# Altium PCB Rackmount_DSP.PcbDoc (part 21 of 24)
Units mil, origin at the board's own origin, x right, y up, seen from the top; angles counter-clockwise.
Board outline 10629.92 x 8267.72 mil, 4 copper layers (Top Layer, Mid Layer 1, Mid Layer 2, Bottom Layer), stack 36.2 mil thick; 4500 components, 1565 nets, 9765 pads, 3289 vias.
Unrouted connection lines stored in the file: 1.
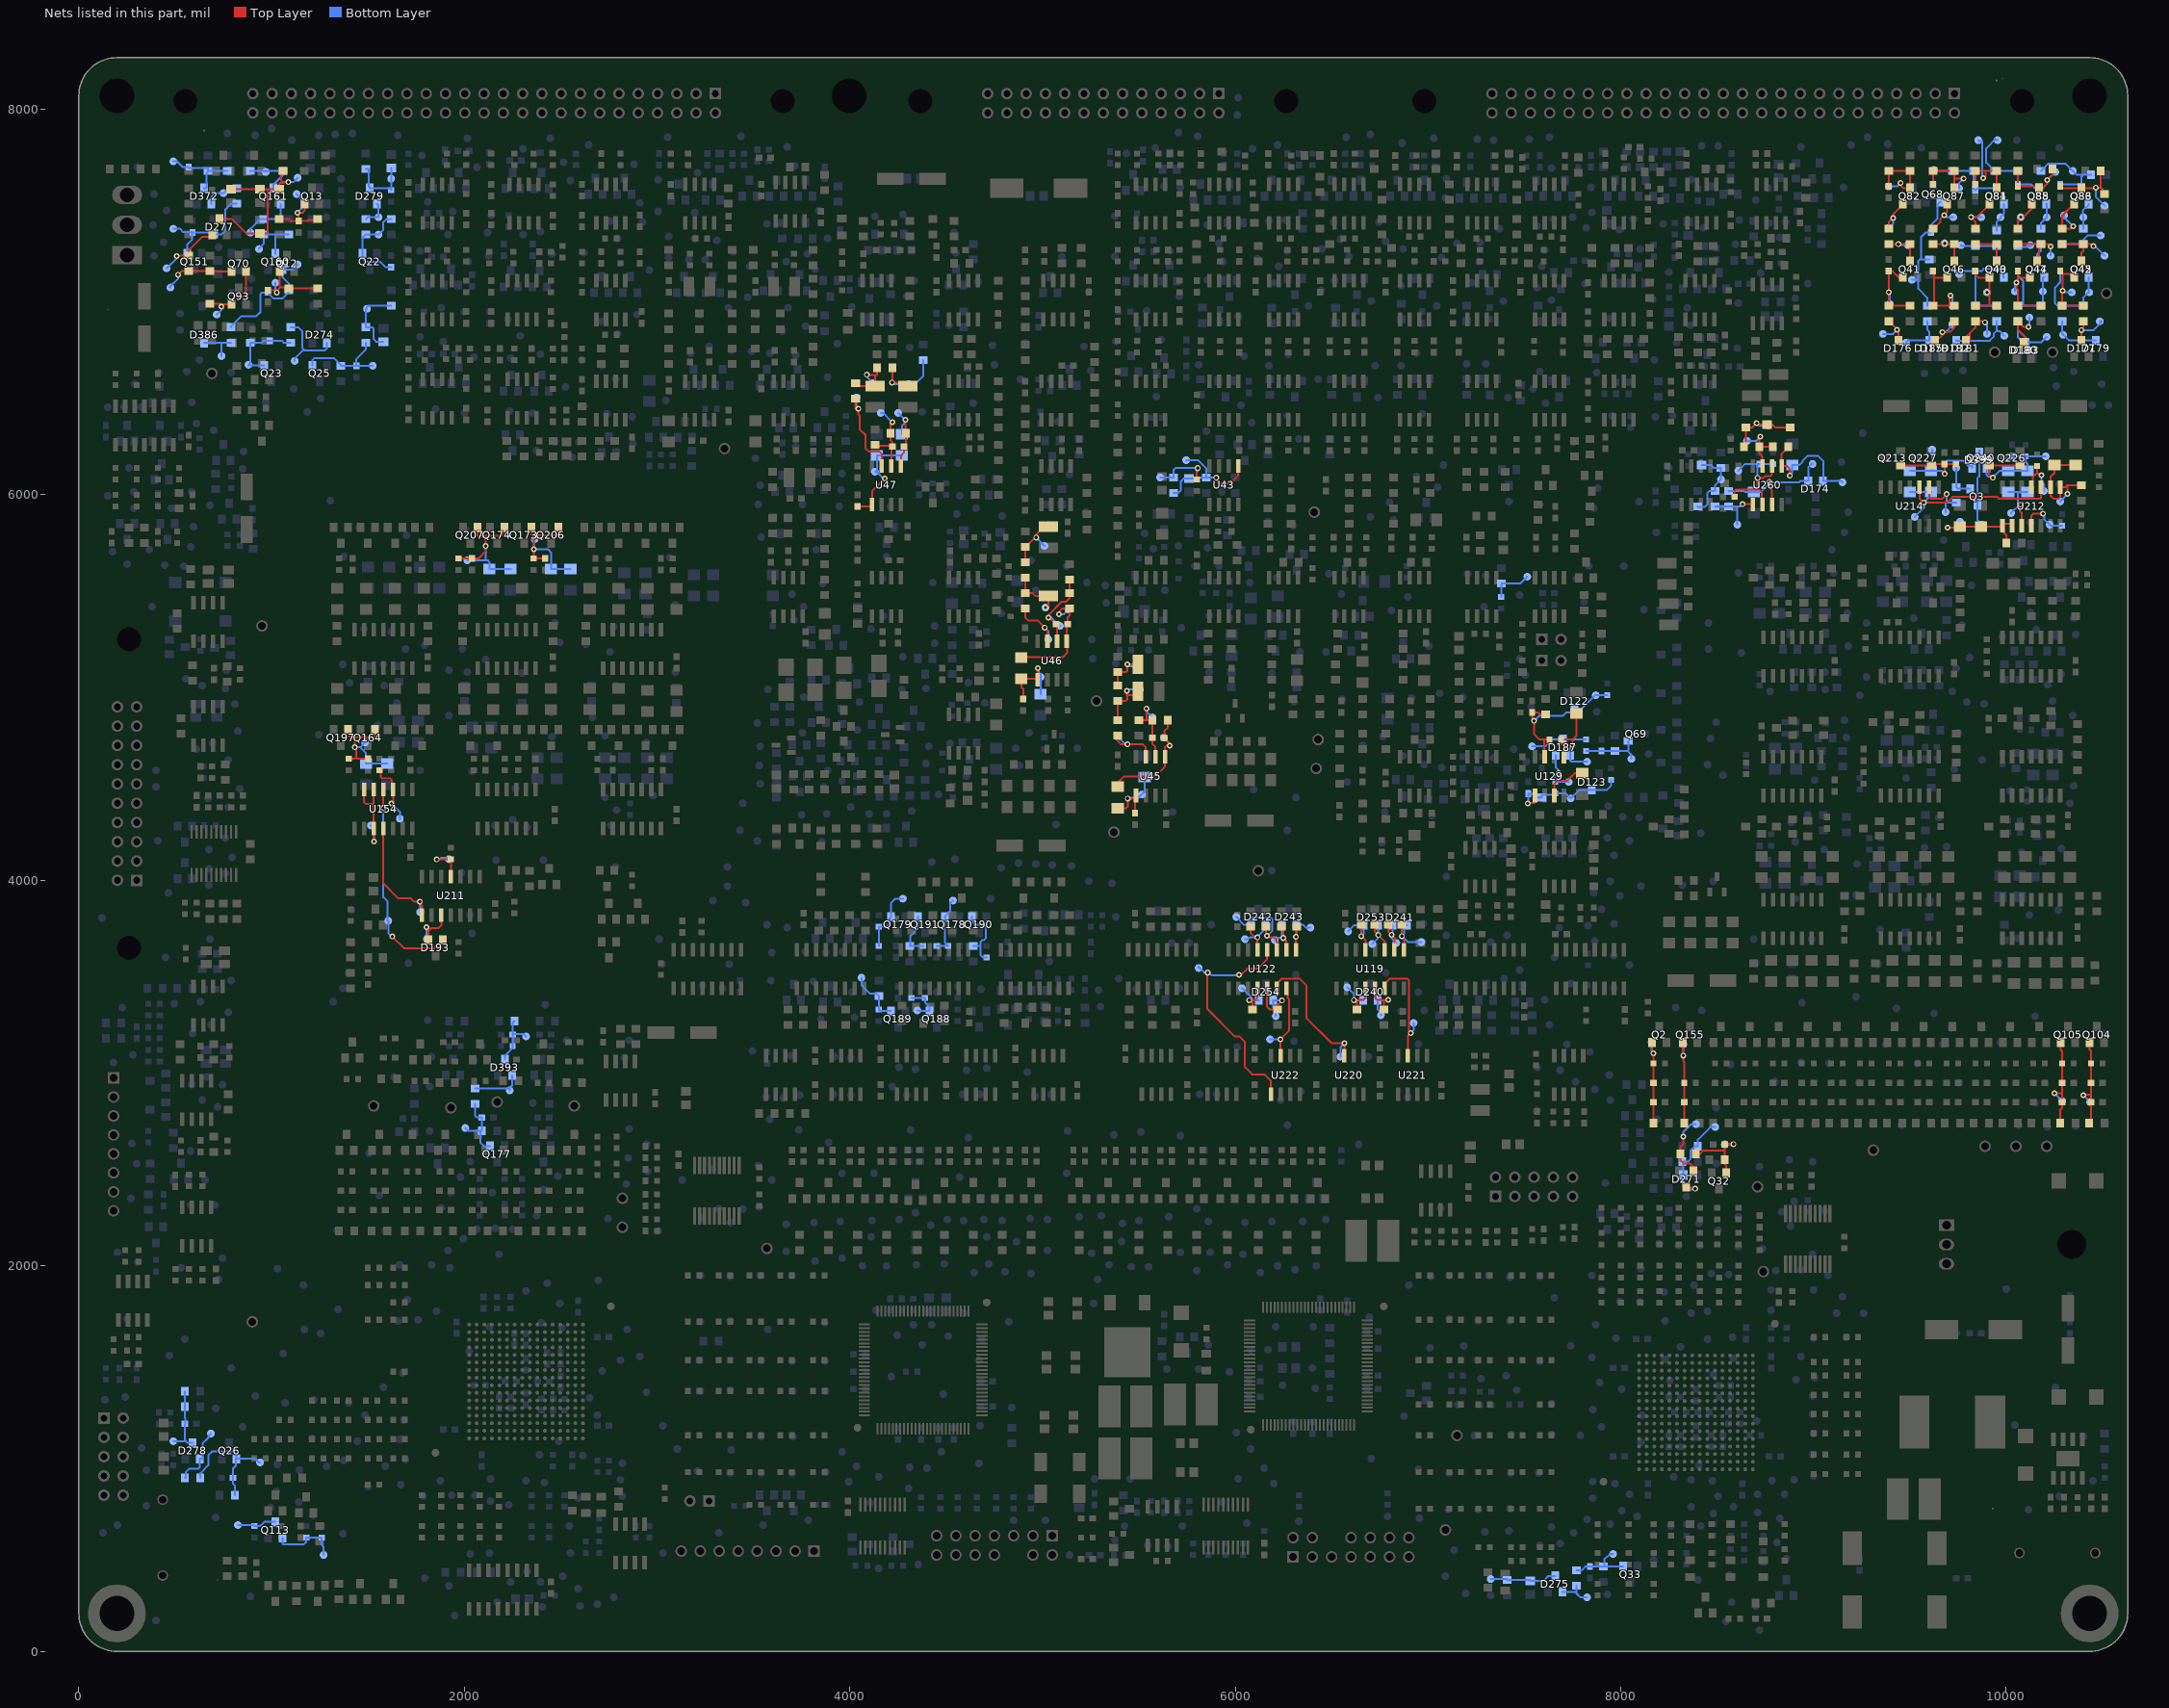
[diagram p23: the nets of this part, all layers, seen from the top]

## Via types
v1: diameter 30, hole 16, Top Layer to Bottom Layer, 3143 vias
v2: diameter 22, hole 12, Top Layer to Bottom Layer, 146 vias

## Nets (pads, with @x,y where several pads share a name; then routed paths per layer and width w, separated by ;. In a path a pad name is that pad's centre, name@x,y a point inside that pad or via, vN(x,y) a via of type N, cw(c..) or ccw(c..) an arc to the next point about the centre after c; other vN are vias at no path point) (continued)
XSIG250120: C1121.2 Q164.1 Q197.1 R2535.1 R2679.2 R2680.2 TP1847.1 | length 694.2
  Top Layer w10: Q197.1@1397.5,4781.5 1397.5,4752.03 1406.53,4743 1436.29,4743 ; R2535.1@1400,4630 1431,4630 1437.99,4636.99 ; C1121.2@1500,4630 1445.06,4630 1438.07,4636.99 1437.99,4636.99 ; Q164.1@1537.5,4781.5 1537.5,4752.96 1527.54,4743 1436.29,4743 ; 1436.29,4743 1436.29,4740.93 1431.29,4735.93 v1(1431.29,4690.01) 1437.99,4683.3 1437.99,4636.99
  Bottom Layer w10: v1(1431.29,4690.01) 1459.6,4690.01 ; TP1847.1@1485,4715 1460.01,4690.01 1459.6,4690.01 ; R2680.2@1600,4605 R2679.2@1490,4605 1490,4659.6 1459.6,4690.01
XSIG250129: TP1637.1 U154.5 U154.6 U154.10 | length 482.6
  Top Layer w10: U154.6@1480,4470 1480,4405.06 1489.9,4395.16 1522.56,4395.16 ; U154.5@1530,4470 1530,4402.6 1522.56,4395.16 ; v1(1530.99,4201.27) 1530.99,4219.01 1530,4220 U154.10@1530,4270 1530,4395.16 1522.56,4395.16
  Bottom Layer w10: TP1637.1@1515,4285 1516.76,4285 1530.99,4270.77 v1(1530.99,4201.27)
XSIG250132: TP1638.1 U154.11 U211.8 | length 641.9
  Top Layer w10: U154.11@1580,4270 1580,3984.36 1658.39,3905.97 1722.42,3905.97 1739.58,3888.8 v1(1769.58,3888.8) 1769.58,3880.42 1780,3870 U211.8@1780,3820
  Bottom Layer w10: v1(1769.58,3888.8) 1770,3888.39 TP1638.1@1770,3835
XSIG250134: D193.1 TP1639.1 U154.4 | length 1094.9
  Top Layer w10: v1(1580,4375.11) U154.4@1580,4470 ; v1(1625.77,3708.65) 1686.89,3647.53 1843.53,3647.53 D193.1@1887.5,3691.5
  Bottom Layer w10: v1(1580,4375.11) 1580,3912.74 1601.89,3890.84 1601.89,3790 TP1639.1@1605,3790 1605,3726.61 v1@1626.19,3705.42 ; v1(1625.77,3708.65) 1626.19,3708.65 v1@1626.19,3705.42 ; v1@1626.19,3705 v1@1626.19,3705.42
XSIG250135: D193.2 TP1640.1 U211.10 | length 264.8
  Top Layer w10: v1(1804.02,3756.86) 1812.5,3748.38 1812.5,3736.44 ; D193.2@1812.5,3691.5 1812.5,3736.44 ; U211.10@1880,3820 1880,3766.24 1865.53,3751.77 1827.83,3751.77 1812.5,3736.44
  Bottom Layer w10: v1(1804.02,3756.86) 1804.02,3700.5 1805,3699.52 TP1640.1@1805,3695
XSIG250160: R2510.1 TP1641.1 U211.4 | length 235.6
  Top Layer w10: v1(1857,4108.17) 1897.17,4108.17 1899,4110 R2510.1@1930,4110 U211.4@1930,4020
  Bottom Layer w10: v1(1857,4108.17) 1872.11,4108.17 1879.66,4115.73 1920,4115.73 TP1641.1@1920,4110
XSIG250174: C1118.2 Q177.1 R2544.1 R2557.1 TP1846.1 | length 381.6
  Bottom Layer w10: TP1846.1@2005,2715 2020,2700 R2557.1@2090,2700 ; R2544.1@2055,2840 2055,2779.5 2059.3,2775.2 2064.5,2770 C1118.2@2090,2770 R2557.1@2090,2700 ; Q177.1@2132.5,2621.5 2101.12,2621.5 2082.26,2640.36 2082.26,2692.26 R2557.1@2090,2700
XSIG250179: D393.1 R2544.2 TP1845.1 | length 264.9
  Bottom Layer w10: R2544.2@2055,2920 2232.17,2920 TP1845.1@2235,2917.17 ; TP1845.1@2235,2910 TP1845.1@2235,2917.17 ; D393.1@2247.5,2988.5 2247.5,2935.33 2242.7,2930.53 2235,2922.83 TP1845.1@2235,2917.17
XSIG250180: C1141.1 D393.3 R2539.2 R2611.1 TP1844.1 | length 294.1
  Bottom Layer w10: D393.3@2210,3071.5 2210,3088.42 2250,3128.42 R2611.1@2250,3140 C1141.1@2250,3200 C1141.1@2250,3201.73 ; R2539.2@2260,3270 2250,3260 C1141.1@2250,3201.73 ; TP1844.1@2320,3190 2308.27,3201.73 C1141.1@2250,3201.73
XSIG250183: R1575.1 R2562.2 TP1721.1 | length 219.5
  Bottom Layer w10: R1575.1@7380,5470 R2562.2@7380,5540 7478.68,5540 7513.68,5575 TP1721.1@7515,5575
XSIG250184: C953.2 R1955.2 R2563.1 TP1259.1 U43.1 | length 663.1
  Top Layer w10: v1(5900.87,6088.71) 5900.87,6079 5919.88,6060 5975,6060 6015,6100 U43.1@6015,6150
  Bottom Layer w10: R2563.1@5680,6010 5704.48,6010 5717.57,6023.09 5717.57,6069.71 5732.86,6085 C953.2@5760,6085 5807.5,6085 5812.5,6090 R1955.2@5850,6090 ; TP1259.1@5745,6180 5805.97,6180 5850,6135.97 R1955.2@5850,6090 ; v1(5900.87,6088.71) 5900.87,6079 5889.88,6090 R1955.2@5850,6090
XSIG250187: R1576.1 R2563.2 TP1722.1 | length 298.9
  Top Layer w10: R1576.1@5800,6080 5800,6133.01 v1(5805.27,6138.27)
  Bottom Layer w10: TP1722.1@5610,6090 R2563.2@5680,6090 5680,6129.6 5688.67,6138.27 v1(5805.27,6138.27)
XSIG250195: C1131.2 Q173.1 Q206.1 R2344.2 R2531.1 R2677.2 TP1723.1 | length 736.6
  Top Layer w10: Q173.1@2347.5,5831.5 2347.5,5792.89 2350.32,5790.06 2350.44,5790.06 ; v1(2360.3,5717.77) v1@2360,5717.77 ; C1131.2@2420,5670 R2531.1@2360,5670 v1@2360,5717.77 ; Q206.1@2487.5,5831.5 2487.5,5799.92 2477.64,5790.06 2350.44,5790.06 ; 2350.44,5790.06 2360,5780.5 v1@2360,5717.77
  Bottom Layer w10: TP1723.1@2365,5770 2365,5765.9 2360.3,5761.21 v1(2360.3,5717.77) 2433.22,5717.77 2450,5701 R2677.2@2450,5615 R2344.2@2550,5615
XSIG250212: C1132.2 Q174.1 Q207.1 R2343.2 R2532.1 R2669.2 TP1724.1 | length 790.9
  Top Layer w10: R2532.1@1970,5670 C1132.2@2040,5670 2074.22,5670 2110,5705.78 v1(2110,5733.83) 2110,5786.18 2109.18,5787 ; Q207.1@2067.5,5831.5 2067.5,5793 2068.67,5791.83 2068.67,5790.75 2072.42,5787 2109.18,5787 ; Q174.1@2207.5,5831.5 2207.5,5804.4 2190.1,5787 2109.18,5787
  Bottom Layer w10: TP1724.1@2015,5660 2110,5660 ; v1(2110,5733.83) 2110,5660 ; R2669.2@2240,5615 R2343.2@2130,5615 2130,5651.01 2121.01,5660 2110,5660
XSIG250231: R2646.1 TP1843.1 U154.3 | length 332.6
  Top Layer w10: R2646.1@1560,4570 1565.25,4570 1565.25,4536.81 1572.32,4529.74 1614.42,4529.74 1623.5,4520.67 1623.5,4470 U154.3@1630,4470 1630,4408.66 v1(1620.84,4399.5)
  Bottom Layer w10: v1(1620.84,4399.5) 1665,4355.34 TP1843.1@1665,4320
XSIG260008: C768.2 R1084.1 R1853.2 TP1271.1 | length 346
  Top Layer w10: R1084.1@5390,4830 R1853.2@5390,4930 5430.47,4930 5439.78,4939.31 5439.78,4959.68 ; v1(5437.5,4983.77) 5437.5,4959.68 5439.78,4959.68 ; C768.2@5495,4980 5495,4959.68 5439.78,4959.68
  Bottom Layer w10: v1(5437.5,4983.77) 5443.73,4990 TP1271.1@5505,4990
XSIG260009: C763.2 R1853.1 R1856.2 TP1272.1 | length 259.9
  Top Layer w10: R1853.1@5390,5010 R1856.2@5390,5080 5432.71,5080 5439.98,5087.27 v1(5439.98,5120) C763.2@5495,5120
  Bottom Layer w10: v1(5439.98,5120) 5449.98,5110 TP1272.1@5485,5110
XSIG260017: R1085.2 TP1273.1 U46.3 | length 315.2
  Top Layer w10: R1085.2@4910,5410 4910,5363.76 4925.09,5348.67 4973.83,5348.67 v1(5011.22,5311.28) 5025,5297.5 U46.3@5025,5240
  Bottom Layer w10: v1(5011.22,5311.28) 5030,5292.5 TP1273.1@5030,5250
XSIG260018: C537.1 R1845.2 R1851.1 TP71.1 U46.5 | length 395.8
  Top Layer w10: C537.1@4900,4940 4900,4992.5 4890,5002.5 R1845.2@4890,5045 U46.5@4975,5045 ; U46.5@4975,5040 U46.5@4975,5045 ; v1(4975.98,5100.24) 4975,5099.27 U46.5@4975,5045
  Bottom Layer w10: v1(4975.98,5100.24) 4975.98,5085.87 4990,5071.84 TP71.1@4990,5055 R1851.1@4990,4965
XSIG260021: C769.2 R1085.1 R1854.2 TP1274.1 | length 276.6
  Top Layer w10: R1854.2@4910,5570 R1085.1@4910,5490 4948.75,5490 4963.75,5475 C769.2@5030,5475 5030,5426.96 5016.33,5413.29 5016.33,5415 v1(5015,5415)
XSIG260022: C764.2 R1854.1 R1857.2 TP1275.1 | length 314.8
  Top Layer w10: R1854.1@4910,5650 R1857.2@4910,5730 4912.5,5730 v1@4963.75,5781.25 ; v1(4966.85,5778.15) v1@4963.75,5781.25 ; C764.2@5030,5835 5007.5,5835 4963.75,5791.25 v1@4963.75,5781.25
  Bottom Layer w10: v1(4966.85,5778.15) TP1275.1@5010,5735
XSIG260030: R1086.2 TP1276.1 U47.3 | length 511.4
  Top Layer w10: R1086.2@4030,6500 4030,6447.21 4035,6442.21 4035.29,6442.5 4043.57,6442.5 v1@4044.93,6443.85 ; v1(4044.93,6447.17) v1@4044.93,6443.85 ; U47.3@4165,6150 4165,6212.66 4152.66,6225 4097.89,6225 4081.21,6241.68 4081.21,6309.51 4052.28,6338.44 4052.28,6409.12 4044.93,6416.47 v1@4044.93,6443.85
  Bottom Layer w10: TP1276.1@4035,6505 4035,6457.09 v1(4044.93,6447.17)
XSIG260031: C538.1 R1846.2 R1852.1 TP1277.1 U47.5 | length 526.8
  Top Layer w10: C538.1@4040,5940 4115,5940 U47.5@4115,5950 4115,6018.53 v1(4180.43,6083.96)
  Bottom Layer w10: TP1277.1@4130,6120 TP1277.1@4140,6120 ; v1(4180.43,6083.96) 4175.46,6083.96 4140,6119.42 TP1277.1@4140,6120 ; R1846.2@4270,6205 R1852.1@4140,6205 TP1277.1@4140,6120
XSIG260034: C770.2 R1086.1 R1855.2 TP1278.1 | length 313.1
  Top Layer w10: R1086.1@4030,6580 4045,6565 C770.2@4130,6565 4130,6612.5 ; v1(4087.92,6622.98) 4089.74,6621.16 4130,6621.16 4130,6612.5 ; R1855.2@4140,6660 4140,6622.5 4130,6612.5
  Bottom Layer w10: v1(4087.92,6622.98) 4087.92,6612.08 TP1278.1@4120,6580
XSIG260035: C765.2 R1855.1 R1858.2 TP1279.1 | length 441.4
  Top Layer w10: v1(4219.34,6582.46) v1@4220,6582.46 ; R1855.1@4220,6660 v1@4220,6582.46 ; C765.2@4300,6565 4300,6582.46 v1@4220,6582.46
  Bottom Layer w10: v1(4219.34,6582.46) 4226.8,6575 TP1279.1@4305,6575 4340.76,6575 4380,6614.24 R1858.2@4380,6700
XSIG260045: C536.1 R1844.2 R1850.1 TP1280.1 U45.5 | length 410.1
  Top Layer w10: R1844.2@5390,4375 5434.49,4375 5441.35,4381.86 v1@5441.35,4422.85 ; v1(5441.35,4424.93) v1@5441.35,4422.85 ; C536.1@5480,4350 U45.5@5480,4423.59 ; U45.5@5485,4440 5485,4428.59 U45.5@5480,4423.59 ; v1@5441.35,4422.85 5443.43,4424.93 5478.66,4424.93 U45.5@5480,4423.59
  Bottom Layer w10: v1(5441.35,4424.93) 5441.35,4428.35 5497.13,4428.35 TP1280.1@5513.78,4445 ; TP1280.1@5515,4445 TP1280.1@5513.78,4445 ; R1850.1@5530,4535 5530,4461.22 TP1280.1@5513.78,4445
XSIG260048: C520.2 R1844.1 R1859.2 TP1281.1 U45.1 | length 633.7
  Top Layer w10: R1844.1@5390,4485 5390,4506.18 5423.09,4539.26 5584.26,4539.26 5635,4590 U45.1@5635,4640 5635,4690 5643.88,4698.88 v1(5658.91,4698.88) 5658.91,4712.59 C520.2@5631.5,4740 ; C520.2@5630,4740 C520.2@5631.5,4740 ; R1859.2@5650,4830 5650,4792.71 5630.9,4773.61 5630.9,4740.6 C520.2@5631.5,4740
  Bottom Layer w10: TP1281.1@5630,4740 5658.91,4711.09 v1(5658.91,4698.88)
XSIG260050: C520.1 R1097.2 R1859.1 TP1282.1 U45.2 | length 385.9
  Top Layer w10: R1097.2@5500,4830 5538.77,4830 ; v1(5538.77,4890.82) 5538.77,4830 ; U45.2@5585,4640 5584.87,4640 5584.87,4692.85 5570,4707.72 C520.1@5570,4740 R1859.1@5570,4830 5538.77,4830
  Bottom Layer w10: v1(5538.77,4890.82) 5538.77,4876.23 TP1282.1@5570,4845
XSIG260053: R1084.2 TP1283.1 U45.3 | length 302.7
  Top Layer w10: R1084.2@5390,4750 5390,4722.32 5405.79,4706.52 v1(5440.72,4706.52) 5518.48,4706.52 5535,4690 U45.3@5535,4640
  Bottom Layer w10: TP1283.1@5390,4745 5428.48,4706.52 v1(5440.72,4706.52)
XSIG260054: C522.2 R1846.1 R1861.2 TP1284.1 U47.1 | length 392.3
  Top Layer w10: U47.1@4265,6150 4265,6204 4280,6219 C522.2@4280,6250 4290,6250 R1861.2@4290,6320 4290,6323.96 4289.17,6324.79 v1(4289.17,6389.46)
  Bottom Layer w10: TP1284.1@4250,6425 4285.54,6389.46 v1(4289.17,6389.46) 4289.17,6376.67 4270,6357.5 R1846.1@4270,6315
XSIG260056: C522.1 R1099.2 R1861.1 TP1285.1 U47.2 | length 418.5
  Top Layer w10: R1099.2@4130,6260 4130,6253.58 C522.1@4215,6253.58 ; U47.2@4215,6150 C522.1@4215,6253.58 ; C522.1@4220,6250 C522.1@4220,6256.25 ; v1(4220.83,6376.21) 4210,6365.38 R1861.1@4210,6320 4210,6282.5 4220,6272.5 C522.1@4220,6256.25 ; C522.1@4215,6253.58 4215,6256.25 C522.1@4220,6256.25
  Bottom Layer w10: TP1285.1@4160,6425 4172.04,6425 v1(4220.83,6376.21)
XSIG260059: C521.2 R1845.1 R1860.2 TP1286.1 U46.1 | length 624.8
  Top Layer w10: R1845.1@4890,5155 4890,5156.86 5105.06,5156.86 5126.65,5178.45 5126.65,5240 U46.1@5125,5240 5125,5330 C521.2@5130,5330 5130,5365 5140,5375 R1860.2@5140,5410 5102.5,5410 5085.5,5393 v1(5085.5,5379.55)
  Bottom Layer w10: v1(5085.5,5379.55) 5109.55,5379.55 TP1286.1@5135,5405
XSIG260064: C801.1 R1196.2 R1263.1 R1686.2 TP173.1 | length 400.8
  Bottom Layer w10: R1196.2@8400,5940 8400,5936.91 8436.24,5936.91 8448.24,5948.92 8448.24,6008.07 8460.17,6020 R1263.1@8490,6020 8490,6050 TP173.1@8520,6080 R1686.2@8520,6140 8482.5,6140 8467.5,6155 C801.1@8420,6155
XSIG260066: R1263.2 R1621.1 TP1288.1 U260.5 | length 297.8
  Top Layer w10: v1(8631.92,5951.18) 8685,5951.18 U260.5@8685,5950
  Bottom Layer w10: R1263.2@8490,5940 R1621.1@8560,5940 8600.29,5940 ; TP1288.1@8605,5845 8605,5935.29 8600.29,5940 ; v1(8631.92,5951.18) 8620.75,5940 8600.29,5940
XSIG260067: C539.1 R1938.1 R2069.2 TP514.1 U260.2 U260.6 | length 699.7
  Top Layer w10: R2069.2@8590,5990 8590,6019.22 8598.84,6028.05 8710,6028.05 ; U260.6@8735,5950 8731.77,5950 8731.77,6013.13 8716.85,6028.05 8710,6028.05 ; U260.2@8785,6150 8784.45,6150 8784.45,6106.83 8774.47,6096.84 8748.98,6096.84 8740,6087.86 v1(8710,6087.86) 8710,6028.05
  Bottom Layer w10: TP514.1@8610,6125 8645,6160 C539.1@8710,6160 ; v1(8710,6087.86) C539.1@8710,6160 ; R1938.1@8790,6160 C539.1@8720,6160 C539.1@8710,6160
XSIG260074: D174.1 R1433.1 R1621.2 TP172.1 U260.7 | length 671.2
  Top Layer w10: v1(8771.41,6066.84) 8771.41,6036.84 8785,6023.25 U260.7@8785,5950
  Bottom Layer w10: R1621.2@8560,6020 8638.5,6020 8643.5,6015 R1433.1@8690,6015 8726.98,6015 8771.41,6059.43 v1(8771.41,6066.84) 8773.72,6064.53 8925.33,6064.53 8932.3,6071.5 D174.1@8972.5,6071.5 8972.5,6144.22 8991.64,6163.36 TP172.1@8995,6160
XSIG260076: C800.1 R1197.2 R1264.1 R1687.2 TP1289.1 | length 420.9
  Top Layer w10: R1264.1@8640,6250 8650,6260 R1197.2@8650,6350 8682.93,6350 v1(8705.04,6372.11) 8705.04,6366.21 8706.25,6365 C800.1@8760,6365 8785.19,6365 8800.19,6350 R1687.2@8880,6350
  Bottom Layer w10: v1(8705.04,6372.11) 8717.16,6360 TP1289.1@8765,6360
XSIG260078: R1264.2 R1622.1 TP1290.1 U260.3 | length 309.8
  Top Layer w10: v1(8724.54,6301.73) 8720,6297.19 R1264.2@8720,6250 ; U260.3@8735,6150 8735,6200 8732.5,6200 8720,6212.5 R1264.2@8720,6250 ; R1622.1@8790,6250 R1264.2@8720,6250
  Bottom Layer w10: TP1290.1@8655,6280 8702.81,6280 v1(8724.54,6301.73)
XSIG260080: D174.2 R1434.1 R1622.2 TP1291.1 U260.1 | length 665.6
  Top Layer w10: R1622.2@8870,6250 8870,6247.5 8835,6212.5 U260.1@8835,6150 8861.5,6150 8877.4,6134.1 v1(8877.4,6100)
  Bottom Layer w10: v1(8877.4,6100) 8877.5,6100 8890,6112.5 R1434.1@8890,6155 8926.46,6155 8944.5,6173.03 8944.5,6177.45 8969.26,6202.22 9022.27,6202.22 9052.33,6172.16 9052.33,6076.33 D174.2@9047.5,6071.5 9146.41,6071.5 9151.46,6066.46 TP1291.1@9150,6065
XSIG260092: R1111.2 R1896.2 R1897.2 TP1292.1 U212.1 U212.2 | length 604.1
  Top Layer w10: v1(10316.75,6005.27) 10316.75,6048.67 ; R1897.2@10360,6155 R1896.2@10250,6155 10250,6112.5 10230,6092.5 U212.2@10230,6040 10230,5994.57 10245.31,5979.26 10270.57,5979.26 10280,5988.68 U212.1@10280,6040 10306.5,6040 10315.17,6048.67 10316.75,6048.67 ; R1111.2@10390,6050 10390,6048.67 10316.75,6048.67
  Bottom Layer w10: TP1292.1@10280,5965 10312.19,5997.19 10312.19,6000 10316.75,6004.56 v1(10316.75,6005.27)
XSIG260095: R1112.2 R1898.2 R1899.2 TP1751.1 U212.8 U212.9 | length 533.6
  Top Layer w10: v1(9695.46,5829.38) 9754.38,5829.38 R1898.2@9760,5835 R1899.2@9870,5835 U212.8@9980,5835 ; R1112.2@10000,5750 10000,5792.29 9980,5812.29 U212.8@9980,5835 ; U212.9@10030,5840 10030,5850.6 9980,5850.6 U212.8@9980,5840 U212.8@9980,5835
  Bottom Layer w10: v1(9695.46,5829.38) 9729.38,5829.38 TP1751.1@9760,5860
XSIG260101: R983.2 TP1787.1 U214.2 | length 301.1
  Top Layer w10: U214.2@9600,6040 9600,5988.72 9609.47,5979.24 9666.03,5979.24 v1(9690.36,6003.57)
  Bottom Layer w10: TP1787.1@9685,5910 9685,5952.87 9690.36,5958.23 9690.36,5960 ; v1(9690.36,6003.57) 9690.36,5960 ; R983.2@9740,5960 9690.36,5960
XSIG260102: Q3.1 R983.1 TP1788.1 | length 178.4
  Bottom Layer w10: TP1788.1@9740,6140 9742.92,6137.08 9740,6134.16 R983.1@9740,6040 9748.5,6031.5 Q3.1@9812.5,6031.5
XSIG260128: C846.2 C847.2 Q104.1 R1963.2 R1975.2 TP1301.1 | length 524.8
  Top Layer w10: v1(10400.12,2884.88) 10400.12,2888.9 10440,2888.9 ; R1975.2@10430,2740 10440,2740 C846.2@10440,2850 10440,2888.9 ; Q104.1@10432.5,3158.5 10432.5,3120 10440,3112.5 R1963.2@10440,3050 C847.2@10440,2950 10440,2888.9
  Bottom Layer w10: v1(10400.12,2884.88) TP1301.1@10435,2850
XSIG260134: C844.2 C845.2 Q105.1 R1962.2 R1976.2 TP1302.1 | length 521.4
  Top Layer w10: v1(10250.39,2894.61) 10290,2894.61 ; R1976.2@10280,2740 10280,2809 10290,2819 C845.2@10290,2850 10290,2894.61 ; Q105.1@10282.5,3158.5 10282.5,3120 10290,3112.5 R1962.2@10290,3050 C844.2@10290,2950 10290,2894.61
  Bottom Layer w10: v1(10250.39,2894.61) TP1302.1@10290,2855
XSIG260145: R2513.1 TP1667.1 U212.4 | length 240.8
  Top Layer w10: U212.4@10130,6040 10136.5,6040 10136.5,6090.37 10160,6113.87 ; R2513.1@10160,6150 10160,6113.87 ; v1(10181.98,6102.42) 10171.45,6102.42 10160,6113.87
  Bottom Layer w10: v1(10181.98,6102.42) 10181.98,6068.02 10195,6055 TP1667.1@10195,6020
XSIG260146: R2512.1 TP1303.1 U212.11 | length 258.8
  Top Layer w10: U212.11@10130,5840 10130,5890 10142.7,5902.7 v1(10190.92,5902.7)
  Bottom Layer w10: v1(10190.92,5902.7) 10197.3,5902.7 10197.3,5872.7 TP1303.1@10225,5845 10230,5840 R2512.1@10290,5840
XSIG260148: C521.1 R1098.2 R1860.1 TP1287.1 U46.2 | length 480.1
  Top Layer w10: U46.2@5075,5240 5075,5330 C521.1@5070,5330 5068.5,5330 5035.96,5362.54 v1(5030.69,5362.54) 5030.69,5376.67 5099.11,5445.09 5120.66,5445.09 5140,5464.43 R1860.1@5140,5490 R1098.2@5140,5560
  Bottom Layer w10: v1(5030.69,5362.54) 5047.46,5362.54 TP1287.1@5090,5320
XSIG260164: Q189.1 R2585.1 R2618.1 TP1727.1 | length 287.9
  Bottom Layer w10: TP1727.1@4060,3495 4060.54,3494.46 4060.54,3455.94 4105.38,3411.1 4138.9,3411.1 R2618.1@4150,3400 R2585.1@4150,3330 4158.5,3321.5 Q189.1@4212.5,3321.5
XSIG260167: Q188.1 R2580.2 R2627.2 TP1728.1 | length 211.8
  Bottom Layer w10: R2580.2@4320,3390 R2627.2@4390,3390 4390,3365.8 4412.5,3343.3 Q188.1@4412.5,3321.5 4356.93,3321.5 4353.43,3325 TP1728.1@4350,3325
XSIG260172: Q190.1 R2586.1 R2619.1 | length 346.3
  Bottom Layer w10: Q190.1@4632.5,3811.5 4632.5,3786.6 4649.1,3770 4693.21,3770 4705,3758.21 4705,3698.79 4696.21,3690 4687.79,3690 4679,3681.21 4679,3660 ; R2619.1@4640,3660 4679,3660 ; R2586.1@4710,3600 4690.52,3600 4679,3611.52 4679,3660
XSIG260175: Q178.1 R2581.2 R2628.2 TP1842.1 | length 319.9
  Bottom Layer w10: R2628.2@4450,3660 R2581.2@4510,3660 4492.5,3677.5 Q178.1@4492.5,3811.5 4520.82,3839.82 4520.82,3880.82 TP1842.1@4535,3895
XSIG260186: Q191.1 R2587.1 R2620.1 | length 238.1
  Bottom Layer w10: R2620.1@4310,3660 R2620.1@4312.5,3660 ; Q191.1@4352.5,3811.5 4352.5,3750.15 4313.98,3711.63 4313.98,3661.48 R2620.1@4312.5,3660 ; R2587.1@4380,3660 R2620.1@4312.5,3660
XSIG260189: Q179.1 R2582.2 R2629.2 TP1729.1 | length 343.1
  Bottom Layer w10: R2582.2@4150,3660 R2629.2@4150,3760 4190.25,3760 4206.22,3775.97 4206.22,3801.72 4212.5,3808 Q179.1@4212.5,3811.5 4212.5,3881.3 4236.2,3905 TP1729.1@4275,3905
XSIG260206: C1161.2 D399.2 Q213.1 Q227.1 R2654.1 R2681.2 R2682.2 TP1841.1 | length 868.3
  Top Layer w10: Q213.1@9451.5,6152.5 Q227.1@9611.5,6152.5 9619,6160 C1161.2@9680,6160 ; v1(9679.84,6108.34) 9679.84,6127.34 9680,6127.5 C1161.2@9680,6160 ; R2654.1@9740,6160 C1161.2@9680,6160
  Bottom Layer w10: R2681.2@9500,6125 R2682.2@9610,6125 ; TP1841.1@9615,6235 9615,6130 R2682.2@9610,6125 ; D399.2@9822.5,6138.5 9822.5,6148.5 9804.97,6148.5 9775.56,6177.91 9693.94,6177.91 9679.84,6163.82 v1(9679.84,6108.34) 9663.18,6125 R2682.2@9610,6125
XSIG260209: R2681.1 R2682.1 TP1298.1 U212.3 U214.3 | length 1044.2
  Top Layer w10: U214.3@9550,6040 9550,5981.4 v1(9572.16,5959.24) 9692.08,5959.24 9721.5,5988.66 9952.84,5988.66 9961.3,5980.21 10177.54,5980.21 10180,5982.67 U212.3@10180,6040
  Bottom Layer w10: R2681.1@9500,6015 R2682.1@9603.16,6015 ; TP1298.1@9525,5885 9572.16,5932.16 v1(9572.16,5959.24) 9603.16,5990.25 R2682.1@9603.16,6015 ; R2682.1@9610,6015 R2682.1@9603.16,6015
XSIG260227: C1160.2 D399.1 Q226.1 Q240.1 R2653.1 R2683.2 R2684.2 TP1840.1 | length 754.5
  Top Layer w10: v1(9929.64,6088.69) 9911.5,6106.83 Q240.1@9911.5,6152.5 Q226.1@10071.5,6152.5
  Bottom Layer w10: D399.1@9897.5,6138.5 9897.5,6102.83 9906.37,6093.96 9924.37,6093.96 v1(9929.64,6088.69) 9965.95,6125 R2684.2@10010,6125 R2683.2@10110,6125 10110,6160 10100,6170 R2653.1@10100,6200 ; C1160.2@10030,6200 R2653.1@10100,6200 ; TP1840.1@10205,6200 R2653.1@10100,6200
XSIG260230: R2683.1 R2684.1 TP1839.1 U212.10 | length 354.1
  Top Layer w10: v1(10074.66,5948.31) 10070.61,5944.26 10070.61,5915.26 10080,5905.87 U212.10@10080,5840
  Bottom Layer w10: R2684.1@10010,6015 10060.25,6015 ; TP1839.1@10025,5905 10068.31,5948.31 v1(10074.66,5948.31) 10074.66,5949.28 10060.25,5963.69 10060.25,6015 ; R2683.1@10110,6015 10060.25,6015
XSIG260232: D399.3 Q3.3 TP1838.1 | length 411
  Bottom Layer w10: D399.3@9860,6221.5 9860,6231.13 D399.3@9860.19,6231.31 ; D399.3@9860,6231.5 D399.3@9860.19,6231.31 ; TP1838.1@9875,5845 9850,5870 Q3.3@9850,5948.5 9850,6086.75 9860.19,6096.94 D399.3@9860.19,6231.31
XSIG270001: Q81.1 R1265.1 TP1304.1 | length 249
  Top Layer w10: R1265.1@9840,7380 9840,7416.78 v1(9816.78,7440) 9847.5,7440 9912.5,7505 Q81.1@9912.5,7508.5
  Bottom Layer w10: v1(9816.78,7440) TP1304.1@9870,7440
XSIG270002: C404.2 Q40.1 R977.1 R1360.2 TP1305.1 | length 383.8
  Top Layer w10: R977.1@9840,6980 9910.59,6980 9912.5,6981.91 ; C404.2@9840,7160 9840,7142.5 9857.26,7125.23 Q40.1@9912.5,7125.23 ; v1@9897.62,7051.27 v1@9900,7051.27 ; Q40.1@9912.5,7128.5 Q40.1@9912.5,7125.23 ; R1360.2@9950,6980 9912.5,6980 9912.5,6981.91 ; v1@9900,7051.27 9912.5,7051.27 Q40.1@9912.5,7125.23 ; v1@9900,7051.27 v1(9900,7050) 9912.5,7050 9912.5,6981.91
XSIG270006: C1110.1 Q81.3 R1143.1 R1380.2 TP1789.1 | length 538.3
  Top Layer w10: C1110.1@9840,7610 R1143.1@9840,7680 9893,7680 ; v1(9880.57,7642.64) 9880.57,7647.64 9893,7647.64 9893,7680 ; Q81.3@9950,7591.5 R1380.2@9950,7680 9893,7680
  Bottom Layer w10: TP1789.1@9855,7840 9860,7835 9874.19,7835 9874.19,7647.64 9880.57,7647.64 v1(9880.57,7642.64)
XSIG270013: Q40.3 R1265.2 R1393.1 | length 198.5
  Top Layer w10: R1265.2@9840,7300 R1393.1@9950,7300 Q40.3@9950,7211.5
XSIG270014: Q82.1 R1266.1 TP1308.1 | length 220.1
  Top Layer w10: R1266.1@9390,7380 9390,7415 9410.96,7435.96 v1(9412.88,7435.96) 9412.88,7455.38 9462.5,7505 Q82.1@9462.5,7508.5
  Bottom Layer w10: TP1308.1@9390,7385 9412.88,7407.88 v1(9412.88,7435.96)
XSIG270015: C405.2 Q41.1 R978.1 R1361.2 TP1309.1 | length 438.6
  Top Layer w10: Q41.1@9462.5,7128.5 9441.88,7128.5 9410.38,7160 C405.2@9390,7160 v1(9390,7050.98) R978.1@9390,6980 R1361.2@9500,6980
  Bottom Layer w10: v1(9390,7050.98) 9395,7045.98 TP1309.1@9395,6990
XSIG270019: C1108.1 Q82.3 R1144.1 R1381.2 TP1310.1 | length 415.2
  Top Layer w10: C1108.1@9390,7600 R1381.2@9390,7680 R1144.1@9500,7680 Q82.3@9500,7591.5 9465,7591.5 9451.84,7604.66 v1(9451.84,7618.35)
  Bottom Layer w10: TP1310.1@9390,7600 9433.49,7600 v1(9451.84,7618.35)
XSIG270026: Q41.3 R1266.2 R1394.1 TP1311.1 | length 250.6
  Top Layer w10: R1266.2@9390,7300 v1(9439.97,7300) R1394.1@9500,7300 Q41.3@9500,7211.5
  Bottom Layer w10: v1(9439.97,7300) 9444.97,7295 TP1311.1@9490,7295
XSIG270027: Q83.1 R1267.1 TP178.1 | length 142.5
  Bottom Layer w10: R1267.1@10400,7380 TP178.1@10400,7440 10396.89,7443.11 10396.89,7474.39 10427.5,7505 Q83.1@10427.5,7508.5
XSIG270028: C406.2 Q42.1 R973.1 R1362.2 TP177.1 | length 494.3
  Bottom Layer w10: C406.2@10280,7160 10280,7101.98 10253.39,7075.38 10253.39,6992.63 10266.03,6980 R973.1@10290,6980 R1362.2@10400,6980 10400,7024.07 10425.93,7050 TP177.1@10429.43,7050 ; Q42.1@10427.5,7128.5 10427.5,7051.93 TP177.1@10429.43,7050 ; TP177.1@10430,7050 TP177.1@10429.43,7050
XSIG270032: C1103.1 Q83.3 R1145.1 R1382.2 TP176.1 | length 489.4
  Bottom Layer w10: R1145.1@10180,7680 10217.01,7717.01 10307.73,7717.01 10344.87,7679.87 TP176.1@10345,7680 10365,7660 10400.17,7660 ; C1103.1@10280,7610 10371.5,7610 Q83.3@10390,7591.5 10390,7649.83 10400.17,7660 ; R1382.2@10440,7660 10400.17,7660
XSIG270039: Q42.3 R1267.2 R1395.1 TP175.1 | length 325.2
  Bottom Layer w10: R1395.1@10290,7300 R1267.2@10400,7300 ; Q42.3@10390,7211.5 10390,7255 10400,7265 R1267.2@10400,7300 ; TP175.1@10490,7345 10421.31,7345 10400,7323.69 R1267.2@10400,7300
XSIG270040: Q84.1 R1268.1 TP174.1 | length 155.3
  Bottom Layer w10: R1268.1@9950,7370 9950,7414.02 9970,7434.02 TP174.1@9970,7438.75 ; TP174.1@9970,7440 TP174.1@9970,7438.75 ; Q84.1@9987.5,7508.5 9987.5,7456.25 TP174.1@9970,7438.75
XSIG270041: C407.2 Q43.1 R979.1 R1363.2 TP161.1 | length 586.8
  Bottom Layer w10: TP161.1@9755,7145 9755,7161.74 9840,7161.74 C407.2@9840,7160 ; R979.1@9950,6980 R1363.2@9840,6980 C407.2@9840,7160 ; Q43.1@9987.5,7128.5 9985.71,7128.5 9985.71,7167 9980.43,7172.28 9883.28,7172.28 9871,7160 C407.2@9840,7160
XSIG270045: C1109.1 Q84.3 R1146.1 R1383.2 TP160.1 | length 433.8
  Bottom Layer w10: TP160.1@9625,7685 9621.1,7681.1 9622.19,7680 R1383.2@9720,7680 R1146.1@9830,7680 9830,7590 C1109.1@9840,7580 9851.5,7591.5 Q84.3@9950,7591.5
XSIG270052: Q43.3 R1268.2 R1396.1 TP159.1 | length 265.6
  Bottom Layer w10: TP159.1@9765,7295 9770,7290 R1396.1@9840,7290 R1268.2@9950,7290 Q43.3@9950,7211.5
XSIG270053: Q85.1 R1269.1 TP1312.1 | length 166.8
  Top Layer w10: R1269.1@10060,7380 10060,7421.76 10074.59,7436.35 10074.59,7440 v1(10075,7440) 10088.66,7440 10090.23,7441.57 10132.5,7483.84 Q85.1@10132.5,7508.5
XSIG270054: C408.2 Q44.1 R974.1 R1364.2 TP1313.1 | length 420.3
  Top Layer w10: C408.2@10060,7160 10060,7126.76 ; Q44.1@10122.5,7128.5 10122.5,7126.76 10060,7126.76 ; R1364.2@10180,6980 R974.1@10060,6980 10060,7063.91 10052.23,7071.68 v1(10052.23,7101.68) 10060,7109.44 10060,7126.76
  Bottom Layer w10: TP1313.1@10045,7055 10045,7094.44 v1(10052.23,7101.68)
XSIG270058: C1105.1 Q85.3 R1147.1 R1384.2 TP1314.1 | length 398.7
  Top Layer w10: R1384.2@10060,7680 C1105.1@10060,7600 10161.5,7600 Q85.3@10170,7591.5 10190.04,7591.5 10211.9,7613.36 v1(10211.9,7633.06) 10240,7661.17 R1147.1@10240,7690
  Bottom Layer w10: v1(10211.9,7633.06) 10244.42,7665.58 10255,7665.58 TP1314.1@10255,7675
XSIG270065: Q44.3 R1269.2 R1397.1 TP1921.1 | length 324.9
  Top Layer w10: R1269.2@10060,7300 R1397.1@10177.5,7300 ; Q44.3@10160,7211.5 10170.26,7211.5 10170.26,7292.76 R1397.1@10177.5,7300 ; v1(10230,7288.29) 10218.29,7300 R1397.1@10180,7300 R1397.1@10177.5,7300
  Bottom Layer w10: TP1921.1@10230,7240 v1(10230,7288.29)
XSIG270066: Q86.1 R1231.1 TP1316.1 | length 293.6
  Top Layer w10: v1(10346.6,7393.4) 10333.2,7380 R1231.1@10290,7380 10290,7448.05 10350.45,7508.5 Q86.1@10352.5,7508.5
  Bottom Layer w10: TP1316.1@10300,7450 10300,7440 v1(10346.6,7393.4)
XSIG270067: C409.2 Q45.1 R975.1 R1365.2 TP1317.1 | length 417.1
  Top Layer w10: C409.2@10280,7160 10291.96,7148.04 C409.2@10291.96,7146.25 ; Q45.1@10352.5,7128.5 10352.5,7132 10338.25,7146.25 C409.2@10291.96,7146.25 ; R975.1@10400,6980 R1365.2@10290,6980 10290,7049.41 10291.96,7051.37 v1(10291.96,7058.02) C409.2@10291.96,7146.25
  Bottom Layer w10: v1(10291.96,7058.02) 10299.98,7050 TP1317.1@10340,7050
XSIG270071: C1107.1 Q86.3 R1148.1 R1385.2 TP1318.1 | length 456.7
  Top Layer w10: C1107.1@10280,7600 10288.5,7591.5 Q86.3@10390,7591.5 10464.95,7591.5 v1(10464.95,7593.8) 10489.66,7593.8 ; R1148.1@10490,7680 10490,7593.8 10489.66,7593.8 ; R1385.2@10510,7560 10510,7573.46 10489.66,7593.8
  Bottom Layer w10: v1(10464.95,7593.8) 10464.95,7545.31 10510,7500.27 TP1318.1@10510,7500
XSIG270078: Q45.3 R1231.2 R1389.1 TP1319.1 | length 337.5
  Top Layer w10: R1231.2@10290,7300 R1389.1@10400,7300 ; Q45.3@10390,7211.5 10390,7255 10400,7265 R1389.1@10400,7300 ; v1(10452.83,7289.84) 10442.67,7300 R1389.1@10400,7300
  Bottom Layer w10: v1(10452.83,7289.84) 10460.16,7289.84 TP1319.1@10510,7240
XSIG270079: Q87.1 R1232.1 TP1320.1 | length 211.2
  Top Layer w10: R1232.1@9620,7380 9622.5,7380 9657.14,7414.64 9657.14,7429.8 v1(9678.36,7451.01) 9692.5,7465.15 Q87.1@9692.5,7508.5
  Bottom Layer w10: v1(9678.36,7451.01) 9689.37,7440 TP1320.1@9725,7440
XSIG270080: C410.2 Q46.1 R976.1 R1366.2 TP1321.1 | length 480.9
  Top Layer w10: R1366.2@9620,6980 R1366.2@9624.55,6980 ; C410.2@9620,7160 9624.55,7160 9624.55,7126 ; Q46.1@9692.5,7128.5 9692.5,7126 9624.55,7126 ; v1(9710.03,7033.66) 9705.58,7033.66 9705.58,6980 ; R976.1@9730,6980 9705.58,6980 ; R1366.2@9624.55,6980 9624.55,7126 ; R1366.2@9624.55,6980 9705.58,6980
  Bottom Layer w10: v1(9710.03,7033.66) 9720,7023.69 TP1321.1@9720,6980
XSIG270084: C1106.1 Q87.3 R1149.1 R1386.2 TP1322.1 | length 377.7
  Top Layer w10: C1106.1@9620,7610 R1386.2@9620,7680 R1149.1@9730,7680 9730,7640.76 ; Q87.3@9730,7591.5 9730,7640.76 ; v1(9778.67,7640.76) 9730,7640.76
  Bottom Layer w10: TP1322.1@9755,7590 9755,7617.1 v1(9778.67,7640.76)
XSIG270091: Q46.3 R1232.2 R1390.1 TP1323.1 | length 204
  Top Layer w10: R1232.2@9620,7300 v1@9680.5,7300 ; v1(9680,7305) 9680.5,7305 v1@9680.5,7300 ; Q46.3@9730,7211.5 R1390.1@9730,7300 v1@9680.5,7300
XSIG270092: D180.3 R974.2 TP1922.1 | length 252.8
  Top Layer w10: D180.3@10090,6791.5 10100,6791.5 10100,6816.35 10060,6856.35 R974.2@10060,6900 10088.8,6871.2 v1(10114.94,6871.2)
  Bottom Layer w10: v1(10114.94,6871.2) 10114.94,6876.35 10120,6881.41 TP1922.1@10120,6920
XSIG270094: D177.3 R975.2 TP1325.1 | length 238.4
  Top Layer w10: D177.3@10390,6801.5 v1(10390,6855) 10400,6865 R975.2@10400,6900
  Bottom Layer w10: v1(10390,6855) 10453.3,6855 10495.1,6896.8 10495.1,6900 TP1325.1@10485,6900
XSIG270095: D178.3 R976.2 TP1326.1 | length 242.2
  Top Layer w10: D178.3@9630,6801.5 9642.04,6801.5 9669.13,6828.59 v1(9669.13,6844.13) 9670.73,6845.73 9709.59,6845.73 9730,6866.15 R976.2@9730,6900
  Bottom Layer w10: v1(9669.13,6844.13) 9685.87,6844.13 9718.27,6876.54 9718.27,6884.55 9718.72,6885 TP1326.1@9720,6885
XSIG270097: D181.3 R977.2 TP1327.1 | length 280
  Top Layer w10: D181.3@9800,6801.5 D181.3@9790,6801.5 9790,6816.49 9810,6836.49 ; 9810,6801.5 9810,6836.49 ; v1(9889.43,6894.91) 9884.34,6900 R977.2@9840,6900 9840,6866.49 9810,6836.49
  Bottom Layer w10: v1(9889.43,6894.91) 9900,6884.34 TP1327.1@9900,6835
XSIG270099: D176.3 R978.2 TP1328.1 | length 203.3
  Top Layer w10: R978.2@9390,6900 9392.5,6900 9433.97,6858.53 v1(9433.97,6855.89) 9440,6849.87 D176.3@9440,6801.5
  Bottom Layer w10: TP1328.1@9360,6835 9413.08,6835 v1(9433.97,6855.89)
XSIG270101: D179.3 R973.2 TP1329.1 | length 254.2
  Bottom Layer w10: R973.2@10290,6900 10290,6835 TP1329.1@10295,6830 10295.37,6830.37 10324.24,6801.5 D179.3@10465,6801.5
XSIG270103: D182.3 R979.2 TP1330.1 | length 340.1
  Bottom Layer w10: D182.3@9740,6801.5 9741.5,6800 9914.5,6800 9935,6820.5 9935,6834.75 9950,6849.75 ; R979.2@9950,6900 9950,6849.75 ; TP1330.1@9990,6825 9965.25,6849.75 9950,6849.75
XSIG270105: Q88.1 R1233.1 TP158.1 | length 142
  Bottom Layer w10: R1233.1@10180,7380 10180,7410 TP158.1@10210,7440 10210,7506 Q88.1@10207.5,7508.5
XSIG270106: C411.2 Q47.1 R980.1 R1367.2 TP171.1 | length 477.4
  Bottom Layer w10: R980.1@10060,6980 10087.5,6980 ; C411.2@10060,7160 10060,7136.73 10087.5,7109.23 10087.5,6980 ; Q47.1@10197.5,7128.5 10190,7128.5 TP171.1@10190,7055 10190,6980 R1367.2@10180,6980 10087.5,6980
XSIG270108: C1104.1 Q88.3 R1150.1 R1387.2 TP1792.1 | length 525.5
  Bottom Layer w10: TP1792.1@9955,7840 9949.96,7840 9944.19,7845.77 9895.85,7797.42 9895.85,7724.15 R1387.2@9940,7680 9940.63,7680.63 10059.37,7680.63 R1150.1@10060,7680 C1104.1@10060,7610 10129.92,7610 10148.42,7591.5 Q88.3@10170,7591.5
XSIG270113: Q47.3 R1233.2 R1391.1 TP1923.1 | length 247.1
  Bottom Layer w10: R1391.1@10060,7290 10065,7285 10115,7285 TP1923.1@10115,7290 ; TP1923.1@10120,7285 TP1923.1@10115,7290 ; TP1923.1@10120,7290 TP1923.1@10115,7290 ; Q47.3@10160,7211.5 10160,7247.68 10180,7267.68 R1233.2@10180,7300 10135,7300 10125,7290 TP1923.1@10125,7295 10120,7295 TP1923.1@10115,7290
XSIG270115: D183.3 R980.2 TP1332.1 | length 255.6
  Bottom Layer w10: R980.2@10060,6900 10060,6816.58 10085.08,6791.5 D183.3@10100,6791.5 10181.5,6791.5 TP1332.1@10210,6820
XSIG270120: C469.2 C478.2 Q2.1 R643.2 R960.2 TP1333.1 | length 482
  Top Layer w10: Q2.1@8162.5,3158.5 8162.5,3108.95 v1(8168.38,3103.06) 8170,3101.45 R643.2@8170,3050 C469.2@8170,2950 C478.2@8170,2850 R960.2@8170,2740
  Bottom Layer w10: TP1333.1@8160,3160 8160,3111.45 v1(8168.38,3103.06)
XSIG270133: C413.2 Q68.1 R982.1 R1369.2 TP169.1 | length 701.4
  Bottom Layer w10: TP169.1@9510,7115 9543.65,7115 ; R982.1@9590,6980 9590,7022.93 9543.65,7069.28 9543.65,7115 ; R1369.2@9600,7220 9558.61,7220 ; Q68.1@9657.5,7518.5 9642.67,7503.67 9642.67,7432.94 9610,7400.28 C413.2@9610,7360 9580.47,7360 9558.61,7338.14 9558.61,7220 ; 9543.65,7115 9543.65,7212.19 9551.46,7220 9558.61,7220
XSIG270136: D185.3 R982.2 TP1334.1 | length 227.4
  Bottom Layer w10: TP1334.1@9480,6790 9491.5,6801.5 D185.3@9600,6801.5 9600,6847.5 9590,6857.5 R982.2@9590,6900
XSIG270148: Q161.1 R2502.1 TP1335.1 | length 264.5
  Bottom Layer w10: TP1335.1@890,7360 890,7380.52 939.48,7430 R2502.1@960,7430 1026.2,7430 1047.5,7451.3 Q161.1@1047.5,7508.5
XSIG270149: C1101.2 Q160.1 R2500.1 R2506.2 TP168.1 | length 678.1
  Bottom Layer w10: R2500.1@790,6870 790,6874.38 840.8,6925.19 919.17,6925.19 942.82,6948.83 942.82,7041.99 949.33,7048.5 C1101.2@980,7048.5 ; C1101.2@980,7050 C1101.2@980,7048.5 ; TP168.1@1135,7195 1108.5,7168.5 Q160.1@1057.5,7168.5 1057.5,7127.5 1090,7095 R2506.2@1090,7060 1087.5,7060 1087.5,7049.31 1057.63,7019.44 1009.06,7019.44 C1101.2@980,7048.5
XSIG270152: Q161.3 R2501.1 R2504.2 TP167.1 | length 283.2
  Bottom Layer w10: R2501.1@890,7680 TP167.1@970,7680 ; TP167.1@970,7675 TP167.1@970,7680 ; Q161.3@1010,7591.5 1010,7610.41 1057.5,7657.91 R2504.2@1057.5,7680 ; R2504.2@1060,7680 R2504.2@1057.5,7680 ; TP167.1@970,7680 R2504.2@1057.5,7680
XSIG270159: Q160.3 R2502.2 R2505.1 TP1336.1 | length 315.8
  Bottom Layer w10: TP1336.1@935,7275 935,7278.99 960,7303.99 R2502.2@960,7350 1015.26,7350 ; Q160.3@1020,7251.5 1020,7345.26 1015.26,7350 ; R2505.1@1090,7350 1015.26,7350
XSIG270160: D386.3 R2500.2 TP166.1 | length 210.6
  Bottom Layer w10: D386.3@650,6788.5 651.5,6790 740,6790 ; TP166.1@740,6720 740,6790 ; R2500.2@790,6790 740,6790
XSIG270173: C421.2 Q25.1 R1285.1 R1377.1 TP191.1 | length 503.6
  Bottom Layer w10: Q25.1@1212.5,6671.5 1212.5,6700.05 1222.45,6710 1321.89,6710 1360,6671.89 R1377.1@1360,6670 C421.2@1440,6670 ; R1285.1@1490,6790 1490,6755.09 1440,6705.09 C421.2@1440,6670 ; TP191.1@1525,6670 C421.2@1440,6670
XSIG270177: C822.1 R1170.2 R1285.2 TP190.1 | length 389.4
  Bottom Layer w10: C822.1@1580,6795 1542.33,6795 1528.28,6809.05 1528.28,6863.67 1521.95,6870 R1285.2@1490,6870 1490,6963.62 1491.38,6965 TP190.1@1495,6965 1495,6972.79 1494.34,6973.45 1500.88,6980 R1170.2@1620,6980
XSIG280002: C540.2 D122.3 R1453.2 R1634.2 R2081.1 TP165.1 U129.3 | length 821
  Top Layer w10: v1(7550.66,4827.28) v1@7550.66,4826.84 ; U129.3@7605,4640 7601.4,4640 7601.4,4730 ; R1634.2@7610,4860 7581,4860 7571,4870 C540.2@7540,4870 7540,4837.5 v1@7550.66,4826.84 ; R2081.1@7630,4730 7601.4,4730 ; v1@7550.66,4826.84 7550.66,4757.92 7578.2,4730.39 7601.4,4730.39 7601.4,4730
  Bottom Layer w10: v1(7550.66,4827.28) 7576.57,4853.19 7698.37,4853.19 7715.18,4870 7760,4870 D122.3@7760,4888.5 7795.44,4888.5 7866.94,4960 TP165.1@7870,4960 R1453.2@7930,4960
XSIG280009: C541.2 D123.3 R1458.2 R1635.2 R2082.1 TP1643.1 U129.5 | length 648.3
  Top Layer w10: v1(7516.78,4399.36) 7516.78,4401.41 7550.92,4401.41 7555,4405.49 U129.5@7555,4440
  Bottom Layer w10: v1(7516.78,4399.36) 7520,4402.57 C541.2@7520,4448.5 ; C541.2@7520,4450 C541.2@7520,4448.5 ; R1458.2@7950,4520 7950,4492.22 7926.28,4468.5 D123.3@7850,4468.5 7783.5,4468.5 TP1643.1@7740,4425 7715,4450 R2082.1@7660,4450 7659,4450 7652.45,4443.45 7590,4443.45 R1635.2@7590,4430 7564.64,4430 7546.14,4448.5 C541.2@7520,4448.5
XSIG280025: C816.1 C823.1 C824.1 C825.1 D277.3 R1151.2 TP1924.1 | length 970.3
  Top Layer w10: D277.3@730,7431.5 794.25,7431.5 870.75,7355 C824.1@940,7355 969.45,7355 980,7365.55 980,7585 ; C825.1@790,7585 C816.1@940,7585 980,7585 ; R1151.2@1060,7680 1049.1,7680 1049.1,7639.42 1049.1,7631.05 1062.12,7618.04 ; v1(1086.65,7622.22) 1066.3,7622.22 1062.12,7618.04 ; 980,7585 C823.1@1040,7585 1040,7613.52 1044.52,7618.04 1062.12,7618.04
  Bottom Layer w10: v1(1086.65,7622.22) 1112.22,7622.22 TP1924.1@1135,7645
XSIG280028: D277.1 R1152.1 TP1339.1 | length 334.6
  Top Layer w10: v1(507.72,7238.61) 509.11,7240 R1152.1@570,7240 570,7268.69 638.68,7337.37 684.87,7337.37 692.5,7345 D277.1@692.5,7348.5
  Bottom Layer w10: TP1339.1@455,7175 507.72,7227.72 v1(507.72,7238.61)
XSIG280035: Q70.1 R1152.2 R1643.1 TP1340.1 | length 372
  Top Layer w10: v1(515.51,7142.11) 533.4,7160 R1152.2@570,7160 R1643.1@680,7160 681.5,7158.5 Q70.1@792.5,7158.5
  Bottom Layer w10: TP1340.1@475,7075 471.3,7078.7 515.51,7122.9 v1(515.51,7142.11)
XSIG280036: Q70.2 Q93.1 R1100.2 TP1341.1 | length 402.5
  Top Layer w10: R1100.2@680,6990 738.5,6990 v1@740,6988.5 ; v1(740,6975.87) v1@740,6988.5 ; Q70.2@867.5,7158.5 867.5,7044.27 851.26,7028.02 809.44,7028.02 792.5,7011.08 Q93.1@792.5,6988.5 v1@740,6988.5
  Bottom Layer w10: TP1341.1@715,6935 740,6960 v1(740,6975.87)
XSIG280039: D187.1 R1451.1 R2081.2 TP1342.1 U129.1 | length 504.5
  Top Layer w10: U129.1@7705,4640 7705,4696 7689.58,4711.42 7689.58,4730 R2081.2@7690,4730 7750.59,4730 ; v1(7750.59,4701.33) 7750.59,4730 ; R1451.1@7770,4865 7770,4749.41 7750.59,4730
  Bottom Layer w10: v1(7750.59,4701.33) 7737.5,4688.24 D187.1@7737.5,4648.5 7737.5,4621.62 7744.12,4615 TP1342.1@7825,4615
XSIG280043: C436.2 Q69.1 R755.2 R1354.2 TP1343.1 | length 317.8
  Bottom Layer w10: R755.2@7820,4670 C436.2@7900,4670 R1354.2@7970,4670 8038.5,4670 ; Q69.1@8038.5,4722.5 8038.5,4670 ; TP1343.1@8055,4630 8055,4651.01 8038.5,4667.51 8038.5,4670
XSIG280046: D187.2 R1452.1 R2082.2 TP164.1 U129.7 | length 496
  Top Layer w10: U129.7@7655,4440 7655,4500.49 7678.13,4523.61 ; v1(7678.13,4557.26) 7678.13,4523.61 ; R1452.1@7800,4555 7761.13,4555 7742.16,4536.03 7723.02,4516.89 7684.85,4516.89 7678.13,4523.61
  Bottom Layer w10: D187.2@7662.5,4648.5 7662.99,4648.5 7662.99,4584.55 7678.13,4569.41 v1(7678.13,4557.26) 7677.02,4557.26 7675.92,4558.36 7670.67,4558.36 7660,4547.69 R2082.2@7660,4510 TP164.1@7730,4510
XSIG280048: D187.3 R755.1 TP163.1 | length 296.6
  Bottom Layer w10: TP163.1@7540,4695 7608.78,4695 7645.28,4731.5 D187.3@7700,4731.5 7820,4731.5 R755.1@7820,4730
XSIG280058: C414.2 Q32.1 R1234.1 R1370.1 TP1345.1 | length 402.4
  Top Layer w10: R1234.1@8390,2580 8409.54,2580 8428.16,2598.62 8540,2598.62 ; Q32.1@8547.5,2481.5 8547.5,2520 8540,2527.5 R1370.1@8540,2550 8540,2598.62 ; v1(8585.21,2631.35) 8585.21,2630 C414.2@8540,2630 8540,2598.62
  Bottom Layer w10: TP1345.1@8540,2630 8585.21,2630 v1(8585.21,2631.35)
XSIG280062: D271.1 R1234.2 TP1346.1 | length 339.9
  Top Layer w10: v1(8324.43,2670.17) 8324.43,2631.93 8310,2617.5 R1234.2@8310,2580 8310,2545.99 8325,2530.99 8359.39,2530.99 8377.5,2512.88 D271.1@8377.5,2491.5
  Bottom Layer w10: v1(8324.43,2670.17) 8324.43,2695.23 8364.2,2735 TP1346.1@8390,2735
XSIG280063: C817.1 D271.3 R1153.2 R1281.1 TP1347.1 | length 548.3
  Top Layer w10: D271.3@8340,2408.5 8340,2404.9 8385.77,2404.9 v1(8385.77,2399.83)
  Bottom Layer w10: v1(8385.77,2399.83) 8385.77,2395.99 8338.73,2395.99 8325,2409.71 C817.1@8325,2470 8325,2535 R1153.2@8320,2540 8348.55,2540 8360.97,2552.41 8360.97,2597.41 8383.56,2620 R1281.1@8400,2620 8400,2654.71 8465.29,2720 TP1347.1@8490,2720
XSIG280068: C415.2 Q33.1 R1235.1 R1371.1 TP1348.1 | length 345.4
  Bottom Layer w10: R1235.1@7770,420 7795.55,420 7815.55,440 C415.2@7840,440 R1371.1@7910,440 R1371.1@7913.96,440 ; TP1348.1@7960,505 7943.05,505 7913.96,475.91 R1371.1@7913.96,440 ; Q33.1@8012.5,441.5 8008.76,441.5 8007.26,440 R1371.1@7913.96,440
XSIG280072: D275.1 R1235.2 TP1349.1 | length 175.5
  Bottom Layer w10: D275.1@7697.5,308.5 7770,308.5 ; R1235.2@7770,340 7770,308.5 ; TP1349.1@7825,280 7790.48,280 7770,300.48 7770,308.5
XSIG280073: C818.1 D275.3 R1154.2 TP188.1 | length 356
  Bottom Layer w10: TP188.1@7325,375 7410,375 R1154.2@7410,370 7530,370 C818.1@7530,365 7598.5,365 7625,391.5 D275.3@7660,391.5
XSIG280075: C358.2 Q26.1 R1241.1 R1357.1 TP187.1 | length 651.5
  Bottom Layer w10: R1241.1@630,900 630,923.93 671.67,965.6 671.67,1017.81 690.86,1037 804.57,1037 817.5,1024.07 Q26.1@817.5,998.5 ; R1357.1@810,810 810,859 800,869 C358.2@800,900 800,949.87 814.66,964.52 814.66,998.5 Q26.1@817.5,998.5 ; TP187.1@940,980 933.18,980 914.68,998.5 Q26.1@817.5,998.5
XSIG280079: D278.1 R1241.2 TP1350.1 | length 324
  Bottom Layer w10: R1241.2@550,900 555.66,900 555.66,930.66 572.11,947.11 617.61,947.11 627.5,957 D278.1@627.5,998.5 641.41,998.5 641.41,1077.52 671.16,1107.27 671.16,1116.16 TP1350.1@685,1130
XSIG280081: C1028.2 D278.3 R1283.1 R2200.2 TP1351.1 | length 370.7
  Bottom Layer w10: TP1351.1@490,1090 490,1089.52 550,1089.52 550,1094.87 ; R1283.1@550,1350 R2200.2@550,1270 550,1212.08 553.37,1208.72 552.51,1207.86 552.51,1180 C1028.2@550,1180 550,1094.87 ; D278.3@590,1081.5 563.37,1081.5 550,1094.87
XSIG280082: Q113.1 R2098.2 R2099.2 TP1352.1 | length 355.5
  Bottom Layer w10: Q113.1@1057.5,588.5 1057.5,557.85 1059.81,555.54 1167.77,555.54 1180,567.78 R2099.2@1180,590 R2098.2@1260,590 1260,552.5 1270,542.5 TP1352.1@1270,500
XSIG280085: Q113.3 R2111.1 TP1353.1 | length 208.9
  Bottom Layer w10: TP1353.1@825,655 910,655 R2111.1@910,650 941,650 962.5,671.5 Q113.3@1020,671.5
XSIG280087: C1043.2 Q151.1 R2228.1 R2281.1 TP186.1 | length 600.2
  Bottom Layer w10: TP186.1@490,7380 525,7380 542.01,7362.99 590,7362.99 C1043.2@590,7360 ; Q151.1@562.5,7251.5 562.5,7299.83 587.82,7325.14 587.82,7357.82 C1043.2@590,7360 ; R2228.1@820,7510 789.23,7510 760,7480.77 760,7371.58 738.42,7350 R2281.1@700,7350 700,7360 C1043.2@590,7360
XSIG280091: D372.1 R2228.2 TP1354.1 | length 188.1
  Bottom Layer w10: D372.1@687.5,7508.5 687.5,7545.83 706.67,7565 TP1354.1@750,7565 775,7590 R2228.2@820,7590
XSIG280093: C1035.2 D372.3 R2206.2 R2227.1 TP185.1 | length 416.8
  Bottom Layer w10: TP185.1@490,7730 509.81,7730 539.81,7700 C1035.2@570,7700 570,7694.58 670,7694.58 R2206.2@670,7680 ; D372.3@650,7591.5 663.01,7591.5 663.01,7668.66 670,7675.64 R2206.2@670,7680 ; R2227.1@770,7680 R2206.2@670,7680
XSIG280105: C1084.2 Q155.1 R2408.2 R2413.2 TP1355.1 | length 480.4
  Top Layer w10: Q155.1@8322.5,3158.5 8322.5,3093.75 v1(8325,3091.25) 8325,3061.25 8330,3056.25 R2408.2@8330,2950 C1084.2@8330,2850 R2413.2@8330,2740
  Bottom Layer w10: v1(8325,3091.25) TP1355.1@8325,3150
XSIG290001: D253.1 R1213.2 TP1356.1 U119.3 | length 260.9
  Top Layer w10: R1213.2@6724.31,3769.09 6724.31,3734.09 6741.81,3716.59 v1(6741.81,3716.05) 6775,3682.86 U119.3@6775,3640
  Bottom Layer w10: TP1356.1@6710,3670 6741.81,3701.81 v1(6741.81,3716.05) D253.1@6741.81,3767.59
XSIG290003: D253.2 R1198.2 TP1357.1 U119.5 | length 295.1
  Top Layer w10: R1198.2@6654.31,3769.09 v1(6654.31,3710.69) 6675,3690 U119.5@6675,3640
  Bottom Layer w10: TP1357.1@6585,3735 6617.59,3767.59 D253.2@6666.81,3767.59 6666.81,3723.19 v1(6654.31,3710.69)
XSIG290005: D241.1 R1162.2 TP1358.1 U119.1 | length 324.2
  Top Layer w10: R1162.2@6864.31,3769.09 v1(6864.31,3710.38) 6864.31,3700.69 6875,3690 U119.1@6875,3640
  Bottom Layer w10: D241.1@6891.81,3767.59 6876.81,3767.59 6876.81,3722.88 v1(6864.31,3710.38) 6894.69,3680 TP1358.1@6965,3680
XSIG290007: D241.2 R1160.2 TP1359.1 U119.2 | length 247.4
  Top Layer w10: R1160.2@6794.31,3769.09 6794.31,3734.09 v1(6810.22,3718.18) 6825,3703.4 U119.2@6825,3640
  Bottom Layer w10: D241.2@6816.81,3767.59 6816.81,3729.09 6810.22,3722.51 v1(6810.22,3718.18) 6810.22,3699.78 TP1359.1@6835,3675
XSIG290009: D240.1 R1158.2 TP1360.1 U119.13 | length 321.4
  Top Layer w10: U119.13@6725,3440 6725,3388.28 6733.29,3379.99 v1@6780.18,3379.99 ; R1158.2@6770,3330 6770,3369.81 v1@6780.18,3379.99 ; v1(6793.65,3379.99) v1@6780.18,3379.99
  Bottom Layer w10: TP1360.1@6755,3300 6755,3314.5 6737.5,3332 D240.1@6737.5,3378.5 6793.65,3378.5 v1(6793.65,3379.99)
XSIG290011: D240.2 R1156.2 TP1361.1 U119.12 | length 297.6
  Top Layer w10: v1(6615.02,3378.5) 6628.52,3365 6630,3365 ; R1156.2@6630,3330 6630,3365 ; U119.12@6675,3440 6675,3390.95 6663.9,3379.85 6630,3379.85 6630,3365
  Bottom Layer w10: TP1361.1@6580,3445 6615.02,3409.98 v1(6615.02,3378.5) D240.2@6662.5,3378.5
XSIG290026: TP1362.1 U119.14 U221.3 | length 623.8
  Top Layer w10: U119.14@6775,3440 6775,3463.5 6801.5,3490 6892.71,3490 6901.5,3481.21 6901.5,3216.9 6909.72,3208.68 v1(6909.72,3207.81) 6895,3193.09 U221.3@6895,3090
  Bottom Layer w10: v1(6909.72,3207.81) 6925,3223.09 TP1362.1@6925,3260
XSIG290037: D243.1 R1216.2 TP1363.1 U122.1 | length 262.6
  Top Layer w10: U122.1@6315,3640 v1(6315,3707.14) 6315,3720 6320,3725 R1216.2@6320,3760
  Bottom Layer w10: v1(6315,3707.14) 6317.5,3709.64 D243.1@6317.5,3768.5 6352.5,3768.5 6366,3755 TP1363.1@6390,3755
XSIG290038: D243.2 R1164.2 TP1364.1 U122.2 | length 249.8
  Top Layer w10: R1164.2@6240,3760 6249.36,3750.64 v1(6249.36,3700.76) 6265,3685.11 U122.2@6265,3640
  Bottom Layer w10: TP1364.1@6205,3690 6215.76,3700.76 v1(6249.36,3700.76) 6242.5,3707.61 D243.2@6242.5,3768.5
XSIG290039: D254.1 R1212.2 TP1365.1 U122.13 | length 353.2
  Top Layer w10: U122.13@6165,3440 6162.98,3440 6162.98,3346.13 6179.11,3330 R1212.2@6216.09,3330 ; R1212.2@6220,3330 R1212.2@6216.09,3330 ; v1(6242.73,3376.34) 6216.09,3349.7 R1212.2@6216.09,3330
  Bottom Layer w10: TP1365.1@6210,3295 6210,3330 6207.5,3330 6197.5,3340 D254.1@6197.5,3378.5 6240.57,3378.5 v1(6242.73,3376.34)
XSIG290040: D254.2 R1199.2 TP1366.1 U122.12 | length 283.9
  Top Layer w10: v1(6072.83,3378.5) v1@6076.5,3378.5 ; R1199.2@6090,3330 6090,3365 v1@6076.5,3378.5 ; U122.12@6115,3440 6115,3390 6103.5,3378.5 v1@6076.5,3378.5
  Bottom Layer w10: TP1366.1@6035,3440 6087.5,3387.5 v1@6087.5,3378.5 ; v1(6072.83,3378.5) v1@6087.5,3378.5 ; D254.2@6122.5,3378.5 v1@6087.5,3378.5
XSIG290046: TP1367.1 U122.14 U220.3 | length 768.4
  Top Layer w10: U122.14@6215,3440 6215,3463.5 6241.5,3490 6332.71,3490 6369.71,3453 6369.71,3284.34 6499.03,3155.02 v1(6566.66,3155.02) 6565,3153.36 U220.3@6565,3090
  Bottom Layer w10: TP1367.1@6545,3085 6545,3133.36 v1(6566.66,3155.02)
XSIG290047: TP1368.1 U122.15 U222.3 | length 432.4
  Top Layer w10: U222.3@6235,3090 v1(6235,3175.52) 6278.25,3218.77 6278.25,3383.25 6271.5,3390 6271.5,3440 U122.15@6265,3440
  Bottom Layer w10: TP1368.1@6180,3175 6234.48,3175 v1(6235,3175.52)
XSIG290060: D242.1 R1166.2 TP1369.1 U122.5 | length 292.5
  Top Layer w10: R1166.2@6080,3760 6080,3726.8 6103.2,3703.59 v1(6115,3703.59) U122.5@6115,3640
  Bottom Layer w10: TP1369.1@6050,3695 6067.26,3695 6075.85,3703.59 v1(6115,3703.59) 6115,3707.84 6157.5,3750.34 D242.1@6157.5,3768.5
XSIG290061: D242.2 R1217.2 TP1370.1 U122.3 | length 512.4
  Top Layer w10: R1217.2@6160,3760 6160,3726.83 v1@6169.1,3717.74 ; v1(6163.98,3712.62) v1@6169.1,3717.74 ; U122.3@6215,3640 6215,3692.09 6203.45,3703.64 6169.1,3703.64 v1@6169.1,3717.74
  Bottom Layer w10: TP1370.1@6005,3810 6046.5,3768.5 D242.2@6082.5,3768.5 6082.5,3801.23 6088.27,3807 6183.71,3807 6192.5,3798.21 6192.5,3738.79 6166.34,3712.62 v1(6163.98,3712.62)
XSIG290065: TP199.1 U122.4 U222.5 | length 1287
  Top Layer w10: v1(5857.41,3520.92) 5855.46,3520.92 5855.46,3332.32 5998.86,3188.91 6022.54,3188.91 6050.25,3161.2 6050.25,3030.71 6087.57,2993.39 6150.94,2993.39 6185,2959.33 U222.5@6185,2890 ; v1(6019.93,3510.23) 6031.2,3510.23 6062.02,3541.05 6116.05,3541.05 6165,3590 U122.4@6165,3640
  Bottom Layer w10: TP199.1@5810,3545 5810,3550.92 5840,3520.92 v1(5857.41,3520.92) 5864.32,3520.92 5879.09,3506.15 6019.93,3506.15 v1(6019.93,3510.23)
XSIG290078: C416.2 Q12.1 R971.1 R1372.2 TP1371.1 | length 433.6
  Top Layer w10: C416.2@980,7060 v1@1026.75,7060 ; v1(1026.28,7049.44) 1026.75,7049.91 v1@1026.75,7060 ; Q12.1@1042.5,7158.5 1042.5,7076.48 ; R1372.2@1090,7070 R1372.2@1107.75,7070 ; R971.1@1240,7070 R1372.2@1107.75,7070 ; v1@1026.75,7060 1042.5,7075.75 1042.5,7076.48 ; 1042.5,7076.48 1101.28,7076.48 R1372.2@1107.75,7070
  Bottom Layer w10: TP1371.1@1020,7100 1020,7055.72 v1(1026.28,7049.44)
XSIG290081: C417.2 Q13.1 R972.1 R1373.2 TP1372.1 | length 446.1
  Top Layer w10: R972.1@1040,7430 1088.25,7430 1098.25,7420 C417.2@1140,7420 ; Q13.1@1172.5,7508.5 1172.5,7475.88 1159.83,7463.21 v1(1134.65,7463.21) 1140,7457.86 C417.2@1140,7420 ; R1373.2@1240,7430 1240,7426.42 1188.17,7426.42 1181.75,7420 C417.2@1140,7420
  Bottom Layer w10: TP1372.1@1130,7560 1153.76,7536.24 1153.76,7484.37 1134.65,7465.26 v1(1134.65,7463.21)
XSIG290086: C418.2 Q22.1 R1236.1 R1374.1 TP198.1 | length 486.9
  Bottom Layer w10: C418.2@1620,7180 1592.73,7180 1564.62,7208.11 1488.34,7208.11 1472.5,7223.95 Q22.1@1472.5,7251.5 1472.5,7335 1487.5,7350 R1236.1@1490,7350 TP198.1@1555,7350 1579.75,7374.75 1579.75,7414.46 1595.28,7430 R1374.1@1620,7430
XSIG290090: D279.1 R1236.2 TP1373.1 | length 140.7
  Bottom Layer w10: R1236.2@1490,7430 1500,7440 TP1373.1@1555,7440 1555,7501 D279.1@1547.5,7508.5
XSIG290091: C819.1 D279.3 R1167.2 R2108.2 TP197.1 | length 339.4
  Bottom Layer w10: R1167.2@1490,7690 1502.99,7690 1502.99,7602.01 1510,7595 D279.3@1510,7591.5 R2108.2@1620,7591.5 ; R2108.2@1620,7580 R2108.2@1620,7591.5 ; C819.1@1620,7695 TP197.1@1620,7640 R2108.2@1620,7591.5
XSIG290095: C419.2 Q23.1 R1237.1 R1375.1 TP196.1 | length 423.4
  Bottom Layer w10: Q23.1@962.5,6671.5 880,6671.5 TP196.1@880,6675 890,6685 R1375.1@890,6790 949,6790 959,6800 C419.2@990,6800 1052.5,6800 1062.5,6790 R1237.1@1100,6790
XSIG290100: D274.1 R1237.2 TP195.1 | length 400.5
  Bottom Layer w10: R1237.2@1100,6870 1137.45,6870 1159.44,6848.01 1159.44,6760.56 1165.6,6754.4 ; TP195.1@1120,6695 1120,6702.63 1118.34,6704.29 1165.6,6751.55 1165.6,6754.4 ; D274.1@1287.5,6788.5 1287.5,6760.43 1277.07,6750 1170,6750 1165.6,6754.4